# Altium PCB Beagle_bone_cape.PcbDoc
Units mm, origin at the board's own origin, x right, y up, seen from the top; angles counter-clockwise.
Board outline 89 x 55.8 mm, 2 copper layers (Top Layer, Bottom Layer); 16 components, 27 nets, 157 pads, 4 vias.
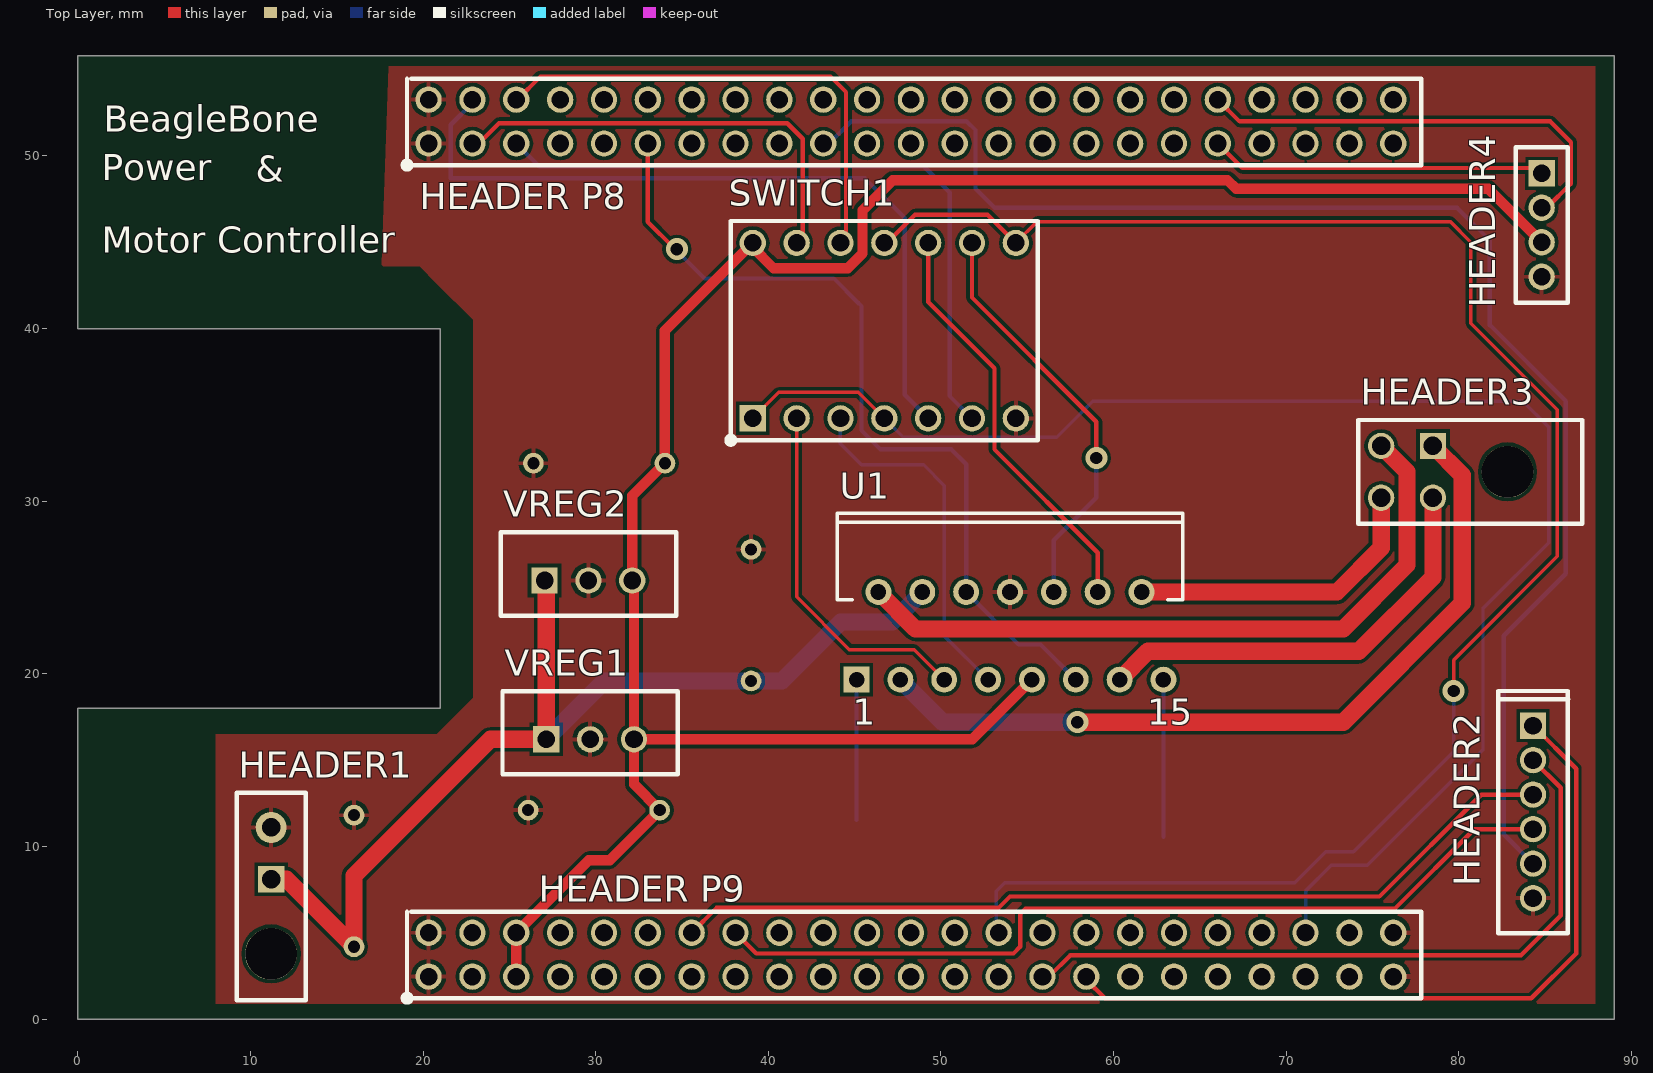
[diagram p0: Top Layer view]
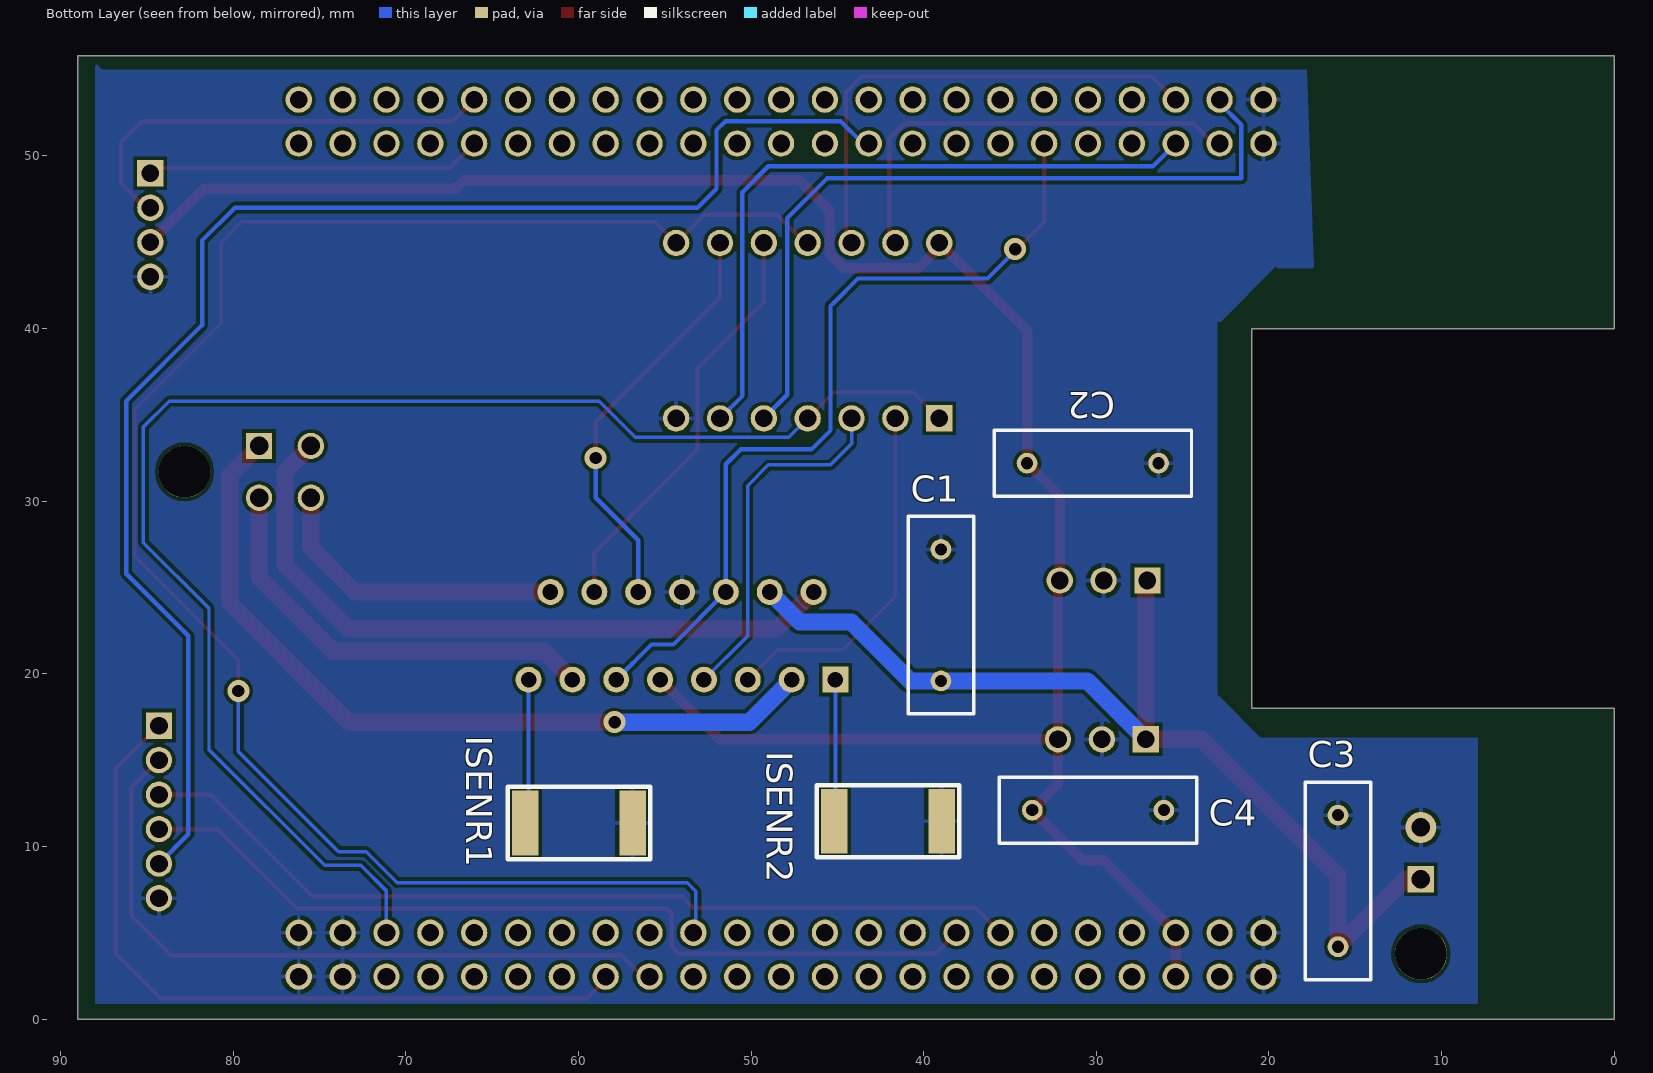
[diagram p1: Bottom Layer view, seen from below]

## Layer stack, top to bottom
Top Layer: signal copper 0.0356
Dielectric: dielectric 0.32, FR-4, Dk 4.8
Bottom Layer: signal copper 0.0356

## Board outline
0,0 0,18 21,18 21,40 0,40 0,55.8 89,55.8 89,0

## Design rules (kind name [scope] priority, off if disabled: settings)
Clearance [All] p1: gap=0.2
PolygonConnect [All] p1: connectstyle=Relief reliefconductorwidth=0.254 reliefentries=4 polygonreliefangle="90 Angle" airgapwidth=0.254
RoutingVias [All] p1: holewidth=0.711 width=1.27 viastyle="Through Hole" minholewidth=0.711 minwidth=1.27 maxholewidth=0.711 maxwidth=1.27
SMDNeckDown [All] p1: percent=50.000
SilkToSolderMaskClearance SilkscreenOverComponentPads [IsPad] p1: minsilkscreentomaskgap=0.254 clearancetoexposedcopper=TRUE
SolderMaskExpansion [All] p1: expansion=0.102
Width [All] p1: maxlimit=1 minlimit=0.2 preferedwidth=0.2
27 further rules are at their usual default settings.

## Classes and differential pairs
component class U_motor_controller: C1 C2 HEADER3 ISENR1 ISENR2 SWITCH1 U1
component class U_io_headers: C3 C4 HEADER1 HEADER2 HEADER4 VREG1 VREG2
component class U_beagle_bone_headers: "HEADER P8" "HEADER P9"

## Components (designator, comment, footprint, x,y, rotation, side; value= is the part's Value field where it differs from the comment)
C1 "Cap" RAD-0.3 39,23.4 r270 bottom
C2 "Cap" RAD-0.3 30.2,32.2 r0 bottom
C3 "Cap" RAD-0.3 16,8 r270 bottom
C4 "Cap" RAD-0.3 29.9,12.1 r0 bottom
HEADER1 "MICROFIT2WAY" MICROFIT2WAY 11.2,8.1 r0 top
HEADER2 "PH HEADER 6 WAY" "PH CONNECTOR 6 WAY" 84.3,17 r270 top
HEADER3 "MICROFIT4WAY" MULTIFIT-4WAY 78.5,33.2 r90 top
HEADER4 "PH HEADER 4 WAY" "PH_HEADER 4WAY" 84.8,49 r270 top
"HEADER P8" "2x23 Header" "2x23 Header" 20.32,50.72 r0 top
"HEADER P9" "2x23 Header" "2x23 Header" 20.32,2.46 r0 top
ISENR1 "CURRENT SENSE RESISTOR" CURRENT_SENSE_RESISTOR 56.1,13.2 r0 bottom
ISENR2 "CURRENT SENSE RESISTOR" CURRENT_SENSE_RESISTOR 38.2,13.3 r0 bottom
SWITCH1 "SN74HC4066" SN74HC4066_DIP 39.1,34.8 r0 top
U1 "L298N" Multiwatt15V 54,22.2 r0 top
VREG1 "VREG" "TO-220 VREG" 24.6,19 r0 top
VREG2 "VREG" "TO-220 VREG" 24.5,28.2 r0 top

## Footprints (in the part's own frame and the unit in brackets; to place one, negate y for a bottom-side part, rotate by r counter-clockwise, add the part's x,y. Pads: shape width x height; smd on the part's side, far side on the other; paste and mask are expansions set on the pad)
"2x23 Header" [mil]
  round 60 hole 40.16: 1(0,0) 2(0,100) 3(100,0) 4(100,100) 5(200,0) 6(200,100) 7(300,0) 8(300,100) 9(400,0) 10(400,100) 11(500,0) 12(500,100) 13(600,0) 14(600,100) 15(700,0) 16(700,100) 17(800,0) 18(800,100) 19(900,0) 20(900,100) 21(1000,0) 22(1000,100) 23(1100,0) 24(1100,100) 25(1200,0) 26(1200,100) 27(1300,0) 28(1300,100) 29(1400,0) 30(1400,100) 31(1500,0) 32(1500,100) 33(1600,0) 34(1600,100) 35(1700,0) 36(1700,100) 37(1800,0) 38(1800,100) 39(1900,0) 40(1900,100) 41(2000,0) 42(2000,100) 43(2100,0) 44(2100,100) 45(2200,0) 46(2200,100)
  silkscreen extent -59,-59 2264,148
CURRENT_SENSE_RESISTOR [mil] "2512 CURRENT_SENSE_RESISTOR"
  rect 60x148 smd: 1(30,72.5) 2(275,72.5)
  silkscreen extent -10,-10 315,155
MICROFIT2WAY [mm] "MICROFIT2WAY"
  round 3 hole 3: 0(0,-4.32)
  rect 1.524x1.524 hole 1.07: 1(0,0)
  round 1.8 hole 1.07: 2(0,3)
  silkscreen extent -2,-7 2,5
MULTIFIT-4WAY [mm]
  round 3 hole 3: 0(-1.5,-4.32)
  rect 1.524x1.524 hole 1.07: 1(0,0)
  round 1.524 hole 1.07: 2(0,3) 3(-3,0) 4(-3,3)
  silkscreen extent -4.5,-8.64 1.5,4.32
Multiwatt15V [mm] "TO, Thru-Hole, Vertical, Heatsink Mounted; 15 Bent Staggered Leads; Pitch 1.27 mm"
  rect 1.5x1.5 hole 0.9: 1(-8.89,-2.54)
  round 1.5 hole 0.9: 2(-7.62,2.54) 3(-6.35,-2.54) 4(-5.08,2.54) 5(-3.81,-2.54) 6(-2.54,2.54) 7(-1.27,-2.54) 8(0,2.54) 9(1.27,-2.54) 10(2.54,2.54) 11(3.81,-2.54) 12(5.08,2.54) 13(6.35,-2.54) 14(7.62,2.54) 15(8.89,-2.54)
  silkscreen extent -10,2.09 10,7.09
"PH CONNECTOR 6 WAY" [mil] "PH CONNECTOR 6 WAY"
  rect 60x60 hole 40.16: 1(0,0)
  round 60 hole 40.16: 2(78.74,0) 3(157.48,0) 4(236.22,0) 5(314.96,0) 6(393.7,0)
  silkscreen extent -79,-80 474,80
"PH_HEADER 4WAY" [mil] "4 WAY PH HEADER"
  rect 60x60 hole 40.16: 1(0,0)
  round 60 hole 40.16: 2(78.74,0) 3(157.48,0) 4(236.22,0)
  silkscreen extent -59,-59 295,59
RAD-0.3 [mm] "Radial Cap, Thru-Hole; 2 Leads; 0.3 in Pin Spacing"
  round 1.2 hole 0.7: 1(-3.81,0) 2(3.81,0)
  silkscreen extent -5.71,-1.91 5.71,1.91
SN74HC4066_DIP [mil] "SN74HC4066_DIP Switch"
  rect 60x60 hole 40.16: 1(0,0)
  round 60 hole 40.16: 2(100,0) 3(200,0) 4(300,0) 5(400,0) 6(500,0) 7(600,0) 8(600,400) 9(500,400) 10(400,400) 11(300,400) 12(200,400) 13(100,400) 14(0,400)
  silkscreen extent -60,-60 650,450
"TO-220 VREG" [mil] "TO-220 PACKAGE VREG"
  rect 60x60 hole 40.16: 1(100,-110)
  round 60 hole 40.16: 2(200,-110) 3(300,-110)
  silkscreen extent 0,-190 400,0

## Part data
C1 C2 C3 C4: "Capacitor"
HEADER1: library part "MICROFIT2WAY HEADER", "MICROFIT2WAY HEADER"
HEADER3: library part "MICROFIT4WAY HEADER", "MICROFIT4WAY HEADER"
SWITCH1: library part "SN74HC4066 SWITCH", "SN74HC4066 SWITCH"
U1: "Dual Full Bridge Driver"
VREG1 VREG2: library part "VOLTAGE REGULATOR", "VOLTAGE REGULATOR"

## Via types
v1: diameter 1.27, hole 0.711, Top Layer to Bottom Layer, 4 vias

## Nets (pads, with @x,y where several pads share a name; then routed paths per layer and width w, separated by ;. In a path a pad name is that pad's centre, name@x,y a point inside that pad or via, vN(x,y) a via of type N, cw(c..) or ccw(c..) an arc to the next point about the centre after c; other vN are vias at no path point)
GND: "HEADER P8.1" "HEADER P8.2" "HEADER P9.1" "HEADER P9.2" "HEADER P9.43" "HEADER P9.44" "HEADER P9.45" "HEADER P9.46" C1.1 C2.1 C3.1 C4.1 HEADER1.2 HEADER2.6 HEADER4.4 ISENR1.1 ISENR2.1 SWITCH1.7 U1.8 VREG1.2 VREG2.2
NetC1_2: C1.2 C3.2 HEADER1.1 U1.4 VREG1.1 VREG2.1 | length 59.4
  Top Layer w1: HEADER1.1 12.09,8.1 C3.2 16,8.3 23.906,16.206 VREG1.1 VREG2.1@27.14,25.306
  Bottom Layer w1: VREG1.1 30.524,19.59 C1.2 40.79,19.59 44.2,23 47.18,23 U1.4
NetC2_2: "HEADER P9.5" "HEADER P9.6" C2.2 C4.2 HEADER4.3 SWITCH1.14 U1.9 VREG1.3 VREG2.3 | length 126.2
  Top Layer w0.254: VREG2.3 VREG2.3@32.22,25.306 ; SWITCH1.14@39.1,44.7 SWITCH1.14
  Top Layer w0.6: 25.4,2.46 25.4,5 29.6,9.2 30.81,9.2 C4.2 32.22,13.59 VREG1.3 ; VREG2.3 32.12,30.31 C2.2 34.01,39.87 SWITCH1.14 ; VREG2.3@32.22,25.306 VREG1.3 ; SWITCH1.14@39.1,44.7 40.3,43.5 44.6,43.5 45.458,44.358 45.458,46.858 47.2,48.6 66.6,48.6 67.1,48.1 81.7,48.1 HEADER4.3 ; U1.9 51.816,16.206 VREG1.3
NetHEADER2_1: "HEADER P9.31" HEADER2.1 | length 44.3
  Top Layer w0.254: 58.42,2.46 58.42,2.28 59.5,1.2 84.2,1.2 86.8,3.8 86.8,14.5 HEADER2.1
NetHEADER2_2: "HEADER P9.29" HEADER2.2 | length 41.1
  Top Layer w0.254: 55.88,2.46 56.26,2.46 57.5,3.7 83.6,3.7 85.9,6 85.9,13.4 HEADER2.2
NetHEADER2_3: "HEADER P9.14" HEADER2.3 | length 52.1
  Top Layer w0.254: 35.56,5 37,6.44 53.34,6.44 54,7.1 75.4,7.1 81.3,13 HEADER2.3
NetHEADER2_4: "HEADER P9.16" HEADER2.4 | length 50.8
  Top Layer w0.254: 38.1,5 39.3,3.8 54.2,3.8 54.6,4.2 54.6,6.1 54.9,6.4 76.3,6.4 80.9,11 HEADER2.4
NetHEADER2_5: "HEADER P8.19" HEADER2.5 | length 84.1
  Bottom Layer w0.254: 43.18,50.72 43.52,50.72 44.8,52 51.5,52 52,51.5 52,48.1 53.1,47 79.9,47 81.8,45.1 81.8,40.2 86.2,35.8 86.2,25.8 82.6,22.2 82.6,10.7 HEADER2.5
NetHEADER3_1: HEADER3.1 U1.3 | length 46.2
  Top Layer w1: v1(57.9,17.2) 73.3,17.2 80.2,24.1 80.2,31.5 HEADER3.1
  Bottom Layer w1: U1.3 50.11,17.2 v1(57.9,17.2)
NetHEADER3_2: HEADER3.2 U1.2 | length 40.6
  Top Layer w1: U1.2 48.52,22.6 73.3,22.6 77,26.3 77,31.7 HEADER3.2
NetHEADER3_3: HEADER3.3 U1.13 | length 25.2
  Top Layer w1: U1.13 61.99,21.3 74.2,21.3 78.5,25.6 HEADER3.3
NetHEADER3_4: HEADER3.4 U1.14 | length 17.8
  Top Layer w1: U1.14 72.94,24.74 75.5,27.3 HEADER3.4
NetHEADER4_1: "HEADER P8.37" HEADER4.1 | length 19.5
  Top Layer w0.254: 66.04,50.72 67.46,49.3 84.5,49.3 HEADER4.1
NetHEADER4_2: "HEADER P8.38" HEADER4.2 | length 26.2
  Top Layer w0.254: 66.04,53.26 67.3,52 85.3,52 86.5,50.8 86.5,48.4 85.1,47 HEADER4.2
"NetHEADER P8_3": "HEADER P8.3" SWITCH1.13 | length 25.7
  Top Layer w0.254: 22.86,50.72 23.22,50.72 24.4,51.9 41.1,51.9 42,51 SWITCH1.13@42,45.32
"NetHEADER P8_4": "HEADER P8.4" SWITCH1.5 | length 44.5
  Bottom Layer w0.254: 22.86,53.26 22.86,53.06 21.6,51.8 21.6,48.7 45.6,48.7 47.9,46.4 47.9,36.16 SWITCH1.5
"NetHEADER P8_5": "HEADER P8.5" SWITCH1.6 | length 39.9
  Bottom Layer w0.254: 25.4,50.72 26.72,49.4 49,49.4 50.5,47.9 50.5,36.1 SWITCH1.6
"NetHEADER P8_6": "HEADER P8.6" SWITCH1.12 | length 28.4
  Top Layer w0.254: 25.4,53.26 25.46,53.26 26.8,54.6 43.6,54.6 44.5,53.7 SWITCH1.12@44.5,45.28
"NetHEADER P8_11": "HEADER P8.11" U1.6 U1.11 | length 48.9
  Top Layer w0.254: 33.02,50.72 33.02,46.18 v1@34.5,44.7
  Bottom Layer w0.254: v1@34.5,44.7 36.3,42.9 43.8,42.9 45.2,41.5 45.4,41.3 45.4,34.1 46.5,33 50.6,33 51.46,32.14 U1.6 54.5,21.7 55.77,21.7 U1.11
  other v1: 34.7,44.6
"NetHEADER P9_28": "HEADER P9.28" SWITCH1.8 SWITCH1.11 | length 102.9
  Top Layer w0.2: SWITCH1.8 55.58,46.2 79.5,46.2 80.7,45 80.7,40.3 85.7,35.3 85.7,26.8 79.7,20.8 v1(79.7,19)
  Top Layer w0.254: SWITCH1.11 46.86,44.96 48.5,46.6 52.7,46.6 SWITCH1.8
  Bottom Layer w0.2: 53.34,5 53.2,5.14 53.2,7.4 53.7,7.9 70.5,7.9 72.3,9.7 73.9,9.7 79.7,15.5 v1(79.7,19) v1@79.7,19.2
"NetHEADER P9_42": "HEADER P9.42" SWITCH1.1 SWITCH1.4 | length 85.7
  Top Layer w0.2: SWITCH1.1 40.6,36.3 45.22,36.3 SWITCH1.4
  Bottom Layer w0.2: SWITCH1.4 47.82,33.7 56.7,33.7 58.8,35.8 83.7,35.8 85.2,34.3 85.2,27.6 81.4,23.8 81.4,15.6 74.7,8.9 72.6,8.9 71.12,7.42 71.12,5
NetISENR1_2: ISENR1.2 U1.15 | length 9.1
  Bottom Layer w0.254: ISENR1.2@62.89,10.564 U1.15
NetISENR2_2: ISENR2.2 U1.1 | length 8.1
  Bottom Layer w0.254: ISENR2.2@45.11,11.533 U1.1
NetSWITCH1_2: SWITCH1.2 U1.5 | length 20.9
  Top Layer w0.2: SWITCH1.2 41.64,24.46 44.7,21.4 48.45,21.4 U1.5
NetSWITCH1_3: SWITCH1.3 U1.7 | length 20.8
  Bottom Layer w0.2: SWITCH1.3 44.18,33.32 45.4,32.1 49,32.1 50.2,30.9 50.2,22.19 U1.7
NetSWITCH1_9: SWITCH1.9 U1.10 | length 24.2
  Top Layer w0.254: SWITCH1.9 51.8,41.8 59,34.6 v1(59,32.5)
  Bottom Layer w0.254: U1.10 56.54,27.74 59,30.2 v1(59,32.5)
NetSWITCH1_10: SWITCH1.10 U1.12 | length 24.3
  Top Layer w0.254: SWITCH1.10 49.26,41.54 53.1,37.7 53.1,33 59.08,27.02 U1.12
pads on no net: "HEADER P8.7" "HEADER P8.8" "HEADER P8.9" "HEADER P8.10" "HEADER P8.12" "HEADER P8.13" "HEADER P8.14" "HEADER P8.15" "HEADER P8.16" "HEADER P8.17" "HEADER P8.18" "HEADER P8.20" "HEADER P8.21" "HEADER P8.22" "HEADER P8.23" "HEADER P8.24" "HEADER P8.25" "HEADER P8.26" "HEADER P8.27" "HEADER P8.28" "HEADER P8.29" "HEADER P8.30" "HEADER P8.31" "HEADER P8.32" "HEADER P8.33" "HEADER P8.34" "HEADER P8.35" "HEADER P8.36" "HEADER P8.39" "HEADER P8.40" "HEADER P8.41" "HEADER P8.42" "HEADER P8.43" "HEADER P8.44" "HEADER P8.45" "HEADER P8.46" "HEADER P9.3" "HEADER P9.4" "HEADER P9.7" "HEADER P9.8" "HEADER P9.9" "HEADER P9.10" "HEADER P9.11" "HEADER P9.12" "HEADER P9.13" "HEADER P9.15" "HEADER P9.17" "HEADER P9.18" "HEADER P9.19" "HEADER P9.20" "HEADER P9.21" "HEADER P9.22" "HEADER P9.23" "HEADER P9.24" "HEADER P9.25" "HEADER P9.26" "HEADER P9.27" "HEADER P9.30" "HEADER P9.32" "HEADER P9.33" "HEADER P9.34" "HEADER P9.35" "HEADER P9.36" "HEADER P9.37" "HEADER P9.38" "HEADER P9.39" "HEADER P9.40" "HEADER P9.41" HEADER1.0 HEADER3.0

## Polygon pours and split planes (outlines as drawn)
GND on Top Layer "Bottom Layer-No Net" (solid, pour order 2): 18,55.2 87.9,55.2 87.9,0.9 8,0.9 7.9,0.8 8,0.9 8,16.5 20.8,16.5 22.6,18.3 22.9,18.6 22.9,40.4 22.9,40.5 20.8,42.6 19.8,43.6 17.6,43.6
GND on Bottom Layer "Bottom Layer-No Net" (solid, pour order 4): 17.8,55 87.6,55 87.9,55.3 88,55.2 88,0.9 7.8,0.9 7.5,0.6 7.9,1 7.9,16.3 20.5,16.3 22.8,18.6 23,18.8 23,40.4 22.8,40.4 19.6,43.6 19.5,43.5 17.4,43.5

## Silkscreen, mask and mechanical layers (free items; w line width, h text height)
Top Overlay:
  text "BeagleBone" at 1.5,51.4 h1.52
  text "Power" at 1.4,48.6 h1.52
  text "&" at 10.3,48.5 h1.52
  text "Motor Controller" at 1.4,44.4 h1.52
Mechanical 1:
  the board outline again, w0.254

## Text inside footprints (layer, text, board x,y; h text height)
U1: Top Overlay "15" at 61.94,17.035 h1.5; Top Overlay "1" at 44.88,17.035 h1.5